# Altium PCB slimWiFi_B.PcbDoc
Units mil, origin at the board's own origin, x right, y up, seen from the top; angles counter-clockwise.
Board outline 2300 x 2000 mil, 2 copper layers (Top Layer, Bottom Layer), stack 61.8 mil thick; 44 components, 25 nets, 156 pads, 246 vias.
Unrouted connection lines stored in the file: 5.
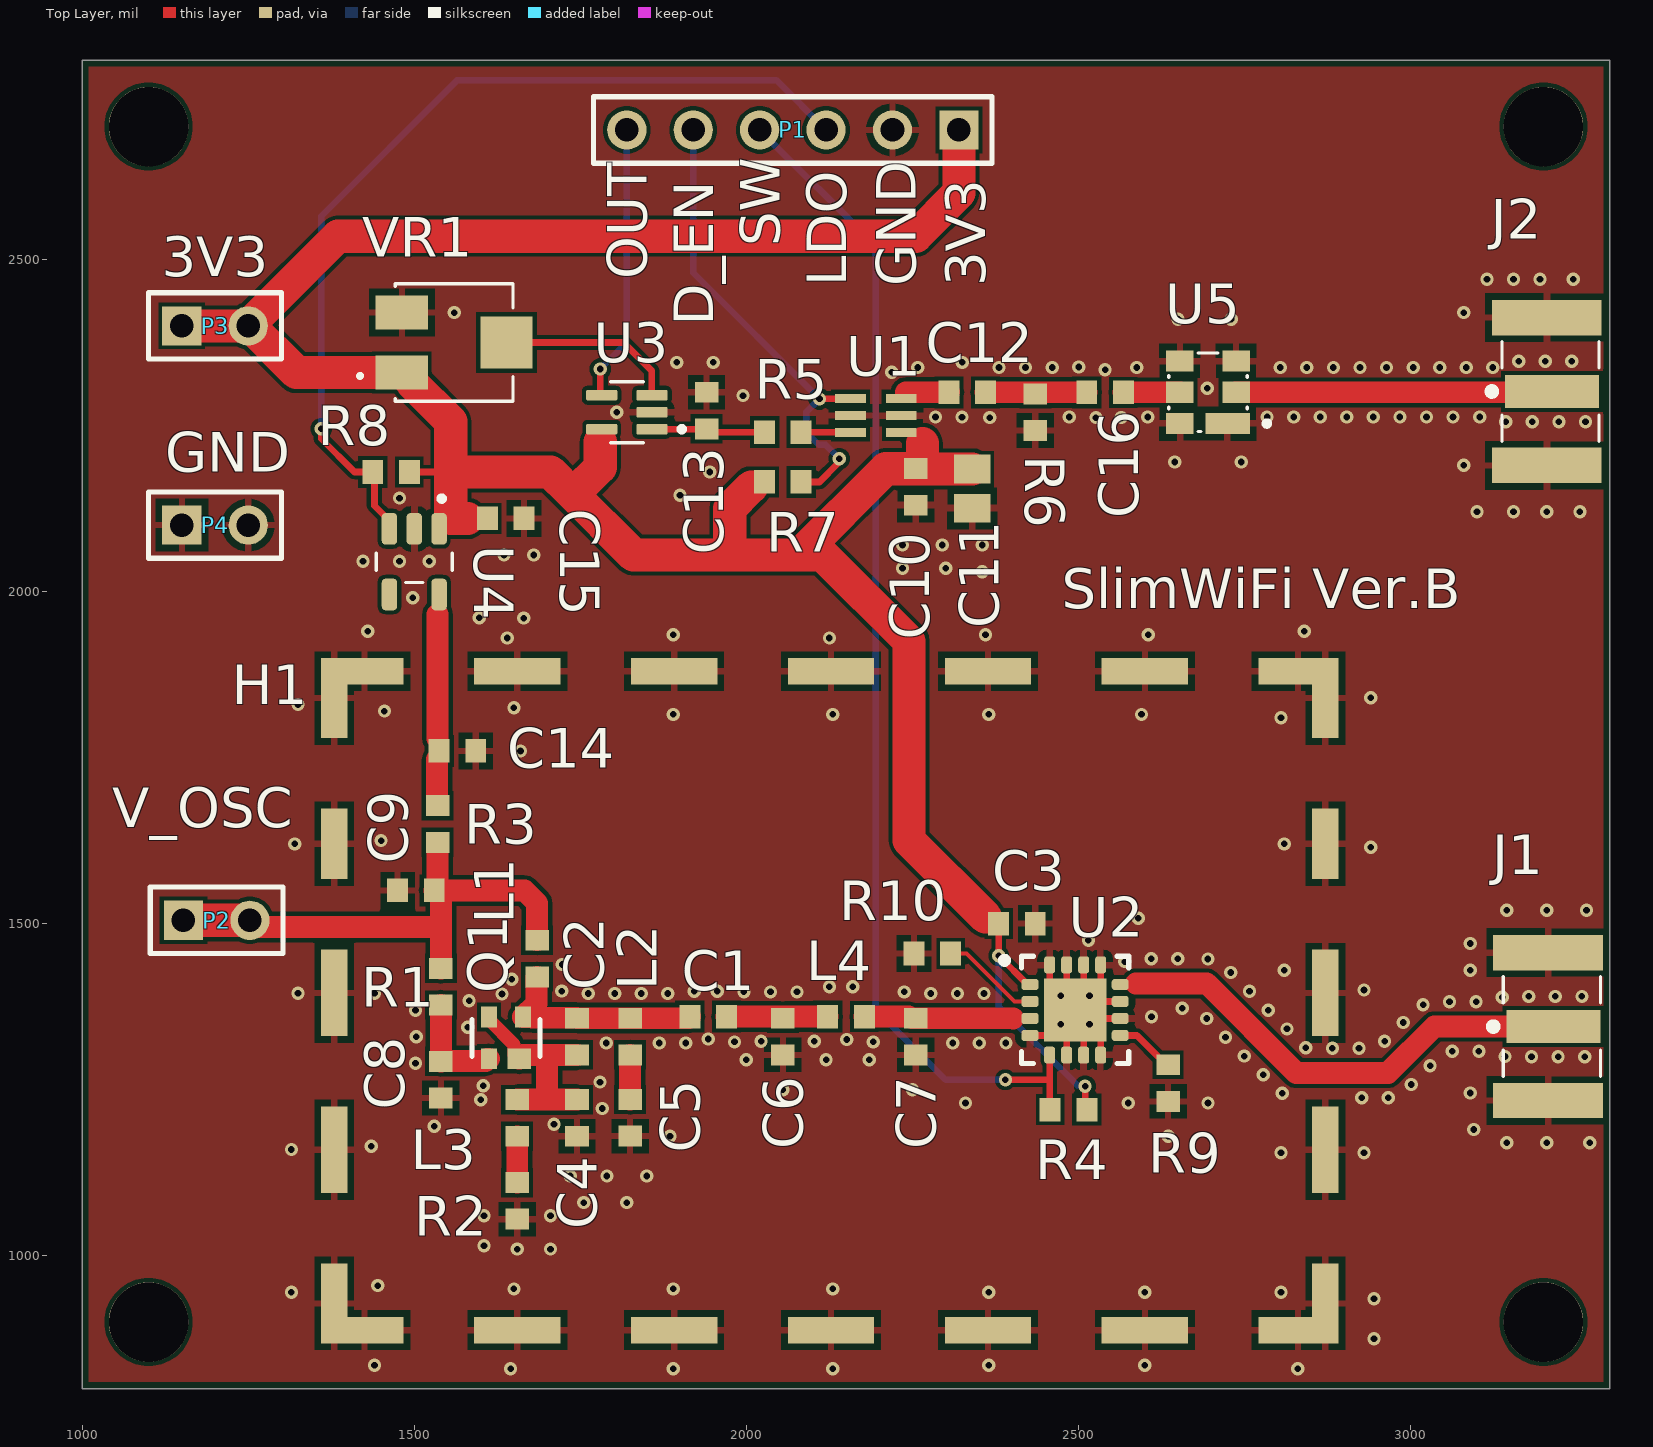
[diagram p0: Top Layer view]
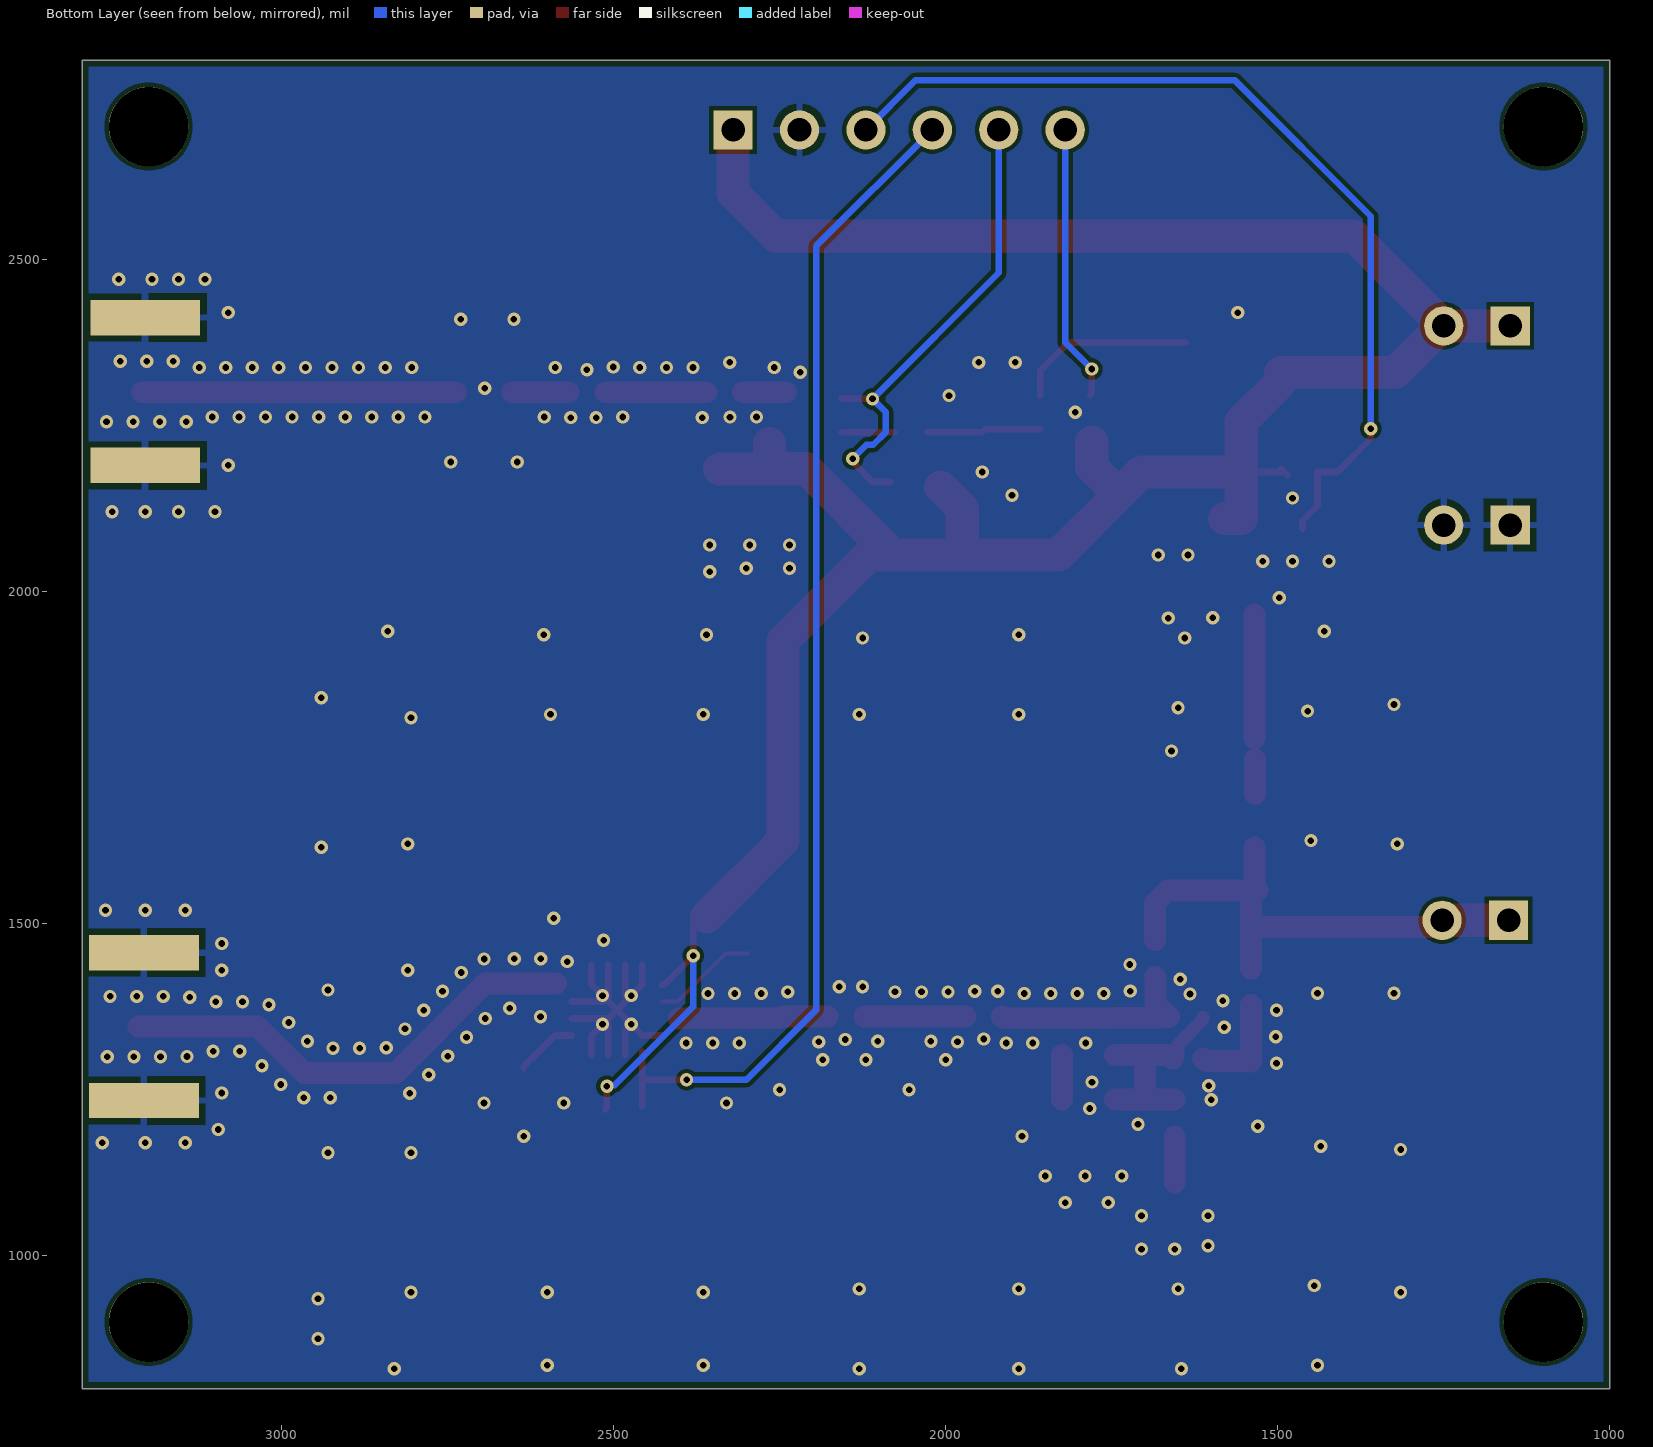
[diagram p1: Bottom Layer view, seen from below]

## Layer stack, top to bottom
Top Solder: solder mask 0.4, Solder Resist, Dk 3.5
Top Layer: signal copper 1.4
Dielectric 1: core 59, Core-043, Dk 4.3
Bottom Layer: signal copper 1.4
Bottom Solder: solder mask 0.4, Solder Resist, Dk 3.5

## Board outline
1000,800 3300,800 3300,2800 1000,2800

## Design rules (kind name [scope] priority, off if disabled: settings)
BoardOutlineClearance [All] p1: gap=10 ignorepadtopadclearanceinfootprint=FALSE except(0: Arc-SplitContinuation Track-SplitContinuation SMDPad-SplitContinuation THPad-SplitContinuation Via-SplitContinuation Fill-SplitContinuation Poly-SplitContinuation Region-SplitContinuation Text-SplitContinuation)
Clearance [All] p1: gap=6 ignorepadtopadclearanceinfootprint=FALSE
HoleSize [All] p1: absolutevalues=TRUE maxlimit=120 minlimit=1 maxpercent=80.000 minpercent=20.000
MinimumSolderMaskSliver [All] p1: minsoldermaskwidth=4
PolygonConnect [All] p1: thpad.connectstyle=Relief thpad.reliefconductorwidth=10 thpad.reliefentries=4 thpad.polygonreliefangle="90 Angle" thpad.airgapwidth=10 smdpad.connectstyle=Relief smdpad.reliefconductorwidth=10 smdpad.reliefentries=4 smdpad.polygonreliefangle="90 Angle" smdpad.airgapwidth=10 via.connectstyle=Direct via.reliefconductorwidth=10 via.reliefentries=4 via.polygonreliefangle="90 Angle" via.airgapwidth=10
RoutingVias [All] p1: holewidth=28 width=28 viastyle="Through Hole" minholewidth=6 minwidth=12 maxholewidth=50 maxwidth=50
SilkToSilkClearance [All] p1: silktosilkclearance=4
SilkToSolderMaskClearance [IsPad] p1: minsilkscreentomaskgap=4 clearancetoexposedcopper=TRUE
SolderMaskExpansion [All] p1: expansion=4 istentingtop=FALSE
Width [All] p1: maxlimit=80 minlimit=6 preferedwidth=33
26 further rules are at their usual default settings.

## Classes and differential pairs
component class SlimRx: C10 C11 C12 C13 C16 J2 R5 R6 R7 U1 U3 U5 VR1
component class SlimPower: C14 C15 H1 P1 P2 P3 P4 R8 U4
component class SlimTx: C1 C2 C3 C4 C5 C6 C7 C8 C9 J1 L1 L2 L3 L4 Q1 R1 R2 R3 R4 R9 R10 U2

## Components (designator, comment, footprint, x,y, rotation, side; value= is the part's Value field where it differs from the comment)
C1 "1n" SMD-0603 1942.56,1360 r180 top
C2 "2.7p" SMD-0603 1745,1330 r90 top
C3 "1uF" SMD-0603 2407.44,1500 r180 top
C4 "3.6p" SMD-0603 1745,1207.44 r90 top
C5 "1.2p" SMD-0603 1825,1207.56 r90 top
C6 "0.5pF" SMD-0603 2055,1330 r90 top
C7 "3p_DNI" SMD-0603 2255,1330 r90 top
C8 "1n" SMD-0603 1540,1265 r90 top
C9 "100pF" SMD-0603 1502.44,1550 r0 top
C10 "100pF" SMD-0603 2255,2157.44 r90 top
C11 "0.1uF" SMD-0805 2340,2155 r90 top
C12 "1nF" SMD-0603 2332.56,2300 r180 top
C13 "1nF_DNI" SMD-0603 1940,2272.44 r270 top
C14 "1uF" SMD-0603 1565,1760 r180 top
C15 "1uF" SMD-0603 1637.56,2110 r180 top
C16 "1nF" SMD-0603 2540,2300 r180 top
H1 "BMI-S-205-F" LAIRD_BMI-S-205-F 2125.59,1383.94 r90 top
J1 "SMA-J-P-H-ST-EM1" SMA-J-P-H-ST-EM1 3215,1345 r90 top
J2 "SMA-J-P-H-ST-EM1" SMA-J-P-H-ST-EM1 3212.87,2301.22 r90 top
L1 "22nH" SMD-0603 1685,1447.44 r90 top
L2 "1.6nH" SMD-0603 1825,1330 r90 top
L3 "22nH" SMD-0603 1655,1207.44 r90 top
L4 "1.6nH" SMD-0603 2150,1360 r0 top
P1 "Header 6" HDR1X6 2320,2695 r180 top
P2 "Header 2" HDR1X2 1152.45,1505 r0 top
P3 "Header 2" HDR1X2 1150,2400 r0 top
P4 "Header 2" HDR1X2 1150,2100 r0 top
Q1 "BFP620" SOT343 1638.12,1327.99 r0 top
R1 "10k" SMD-0603 1540,1405 r90 top
R2 "330" SMD-0603 1655,1082.56 r90 top
R3 "0" SMD-0603 1535,1650 r270 top
R4 "10k" SMD-0603 2485,1220 r180 top
R5 "0" SMD-0603 2055,2240 r180 top
R6 "47" SMD-0603 2435,2270 r90 top
R7 "0" SMD-0603 2055,2165 r0 top
R8 "0" SMD-0603 1465,2180 r180 top
R9 "50" SMD-0603 2635,1260 r270 top
R10 "1k" SMD-0603 2280,1455 r0 top
U1 "LT5534ESC6TR" SOT-6_SC 2195,2265 r0 top
U2 "HMC8038" "PQFN127P600-8N LFCSP-17" 2495,1370 r0 top
U3 "LMV7271MG" SOT65P210X110-5N 1820,2270 r180 top
U4 "TPS7A02XXDBV" SOT95P280X145-5N 1500,2045 r270 top
U5 "SF2124E" FIL_SF2124E 2695,2300 r180 top
VR1 "3314J-1" TRIM_3314J-1 1560,2375 r270 top

## Footprints (in the part's own frame and the unit in brackets; to place one, negate y for a bottom-side part, rotate by r counter-clockwise, add the part's x,y. Pads: shape width x height; smd on the part's side, far side on the other; paste and mask are expansions set on the pad)
FIL_SF2124E [mm] "SMD6"
  rect 1.7x0.81 smd mask+0.051: 1(-0.75,1.195)
  rect 1.05x0.81 smd mask+0.051: 2(-1.075,0) 3(-1.075,-1.195) 4(1.075,-1.195) 5(1.075,0) 6(1.075,1.195)
  silkscreen extent -2.35,-1.5 1.5,1.5
HDR1X2 [mm] "Connector; Header; 2 Position"
  rect 1.5x1.5 hole 0.9: 1(0,0)
  round 1.5 hole 0.9: 2(2.54,0)
  silkscreen extent -1.27,-1.27 3.81,1.27
HDR1X6 [mm] "Connector; Header; 6 Position"
  rect 1.5x1.5 hole 0.9: 1(0,0)
  round 1.5 hole 0.9: 2(2.54,0) 3(5.08,0) 4(7.62,0) 5(10.16,0) 6(12.7,0)
  silkscreen extent -1.27,-1.27 13.97,1.27
LAIRD_BMI-S-205-F [mm]
  rect 1x3.3 smd: 1(-12.6,-12.05) 2(-12.6,-6.05) 3(-12.6,-0.05) 4(-12.6,5.95) 5(-12.6,11.95) 13(12.6,11.95) 14(12.6,5.95) 15(12.6,-0.05) 16(12.6,-6.05) 17(12.6,-12.05)
  rect 1x3 smd: 6(-12.6,17.8) 12(12.6,17.8) 18(12.6,-17.9) 24(-12.6,-17.9)
  rect 3.05x1 smd: 7(-11.575,18.95) 11(11.575,18.95) 19(11.575,-18.95) 23(-11.575,-18.95)
  rect 3.3x1 smd: 8(-5.7,18.95) 9(0.3,18.95) 21(0.3,-18.95) 22(-5.7,-18.95)
  rect 2.7x1 smd: 10(6,18.95) 20(6,-18.95)
"PQFN127P600-8N LFCSP-17" [mm] "4 mm × 4 mm Body and 0.90 mm Package Height"
  rrect50% 0.65x0.42 smd mask+0.051: 1(-1.725,0.975) 2(-1.725,0.325) 3(-1.725,-0.325) 4(-1.725,-0.975) 9(1.725,-0.975) 10(1.725,-0.325) 11(1.725,0.325) 12(1.725,0.975)
  rrect50% 0.42x0.65 smd mask+0.051: 5(-0.975,-1.725) 6(-0.325,-1.725) 7(0.325,-1.725) 8(0.975,-1.725) 13(0.975,1.725) 14(0.325,1.725) 15(-0.325,1.725) 16(-0.975,1.725)
  rect 2.4x2.4 smd mask+0.025: 17(0,0)
  silkscreen extent -2.82,-2.05 2.05,2.05, body extent -2.05,-2.05 2.05,2.05, height 1
SMA-J-P-H-ST-EM1 [mm] "SMA-J-P-H-ST-EM1"
  rect 1.27x3.6 smd: 1(0,0)
  rect 1.35x4.2 smd: 2_1(-2.825,0.2) 3_1(2.825,0.2)
  rect 1.35x4.2 smd far side: 2_2(-2.825,0.2) 3_2(2.825,0.2)
  silkscreen extent -1.9,-1.8 1.9,2.44
SMD-0603 [mm] "SMD Body 1.6x0.8mm, IPC High Density"
  rect 0.8x0.9 smd: 1(-0.7,0) 2(0.7,0)
  body extent -0.87,-0.48 0.87,0.48, height 1.3
SMD-0805 [mm] "Chip Capacitor, Body 2.0x1.3mm, IPC High Density, 0805 Imperial, 2012 Metric"
  rect 1.1x1.4 smd: 1(-0.75,0) 2(0.75,0)
  body extent -1.1,-0.72 1.1,0.72, height 1.4
SOT65P210X110-5N [mm]
  rrect25% 1.19x0.4 smd mask+0.051: 1(-0.96,0.65) 2(-0.96,0) 3(-0.96,-0.65) 4(0.96,-0.65) 5(0.96,0.65)
  silkscreen extent -2.2,-1.17 0.63,1.17, body extent -1.05,-1 1.05,1, height 1.1
SOT95P280X145-5N [mm] "TPS7A02XXDBV"
  rrect50% 1.21x0.59 smd mask+0.051: 1(-1.255,0.95) 2(-1.255,0) 3(-1.255,-0.95) 4(1.255,-0.95) 5(1.255,0.95)
  silkscreen extent -2.51,-1.45 0.8,1.45
SOT343 [mm]
  rect 0.6x0.8 smd: 1(-0.65,-0.8) 3(0.65,0.8) 4(-0.65,0.8)
  rect 0.9x0.8 smd: 2(0.5,-0.8)
  silkscreen extent -1.3,-0.7 1.3,0.7
SOT-6_SC [mm]
  rect 1.171x0.351 smd mask+0.051: 1(-0.97,0.65) 2(-0.97,0) 3(-0.97,-0.65) 4(0.97,-0.65) 5(0.97,0) 6(0.97,0.65)
TRIM_3314J-1 [mm] "3314 - 4mm Square Trimpot Trimming Potentiometer"
  rect 1.3x2 smd: 1(1.15,-2) 3(-1.15,-2)
  rect 2x2 smd: 2(0,2)
  silkscreen extent -2.25,-3.65 2.25,2.25

## Part data
C1 C2 C3 C4 C5 C6 C7 C8 C9 C10 C12 C13 C14 C15 C16: library part CAP0603, "Ceramic Capacitor 0603"
C11: library part CAP0805, "Ceramic Capacitor 0805 Imperial (2012 Metric)"
H1: "RF Shield Frame 1.000 _25.40mm_ X 1.500 _38.10mm_ Solder", Package="TSSOP-14 Laird", Availability=Unavailable, MF="Laird Technologies", MP=BMI-S-205-F, Price=None, SnapEDA_Link=https://www.snapeda.com/parts/BMI-S-205-F/Laird%20Technologies%20EMI/view-part/596236/?ref=snap
J1 J2: "Connector SMA F 50Ohm Solder ST Edge Mount Gold Over Nickel Tray", Package=None, Availability=Unavailable, MF=Samtec, MP=SMA-J-P-H-ST-EM1, Price=None, SnapEDA_Link=https://www.snapeda.com/parts/SMA-J-P-H-ST-EM1/Samtec%20Inc./view-part/?ref=snap
L1 L2 L3 L4: library part L0603, "Inductor 0603"
P1: "Header, 6-Pin", LatestRevisionDate=17-Jul-2002, LatestRevisionNote="Re-released for DXP Platform.", Publisher="Altium Limited"
P2 P3 P4: "Header, 2-Pin", LatestRevisionDate=17-Jul-2002, LatestRevisionNote="Re-released for DXP Platform.", Publisher="Altium Limited"
Q1: "Trans RF BJT NPN 2.3V 0.08A 185mW Automotive 4-Pin(3+Tab) SOT-343 T/R", Package=None, Availability="In Stock", Check_prices=https://www.snapeda.com/parts/BFP620/Infineon+Technologies/view-part/?ref=eda, MF="Infineon Technologies", MP=BFP620, Price=None, Purchase-URL=https://pricing.snapeda.com/search/part/BFP620/?ref=eda, SnapEDA_Link=https://www.snapeda.com/parts/BFP620/Infineon+Technologies/view-part/?ref=snap
R1 R2 R3 R4 R5 R6 R7 R8 R9 R10: library part RES0603, "Resistor-0603"
U1 U3: Package=None, Availability=Unavailable, Price=None
  U1: MP=LT5534ESC6TR
  U3: MP=LMV7271MG
U2: "High Isolation, Silicon SPDT, Nonreflective Switch, 0.1 GHz to 6.0 GHz"
U4: "TPS7A02 Nanopower IQ, 25-nA, 200-mA, Low-Dropout Voltage Regulator With Fast / Transient Response"
U5: "Signal Conditioning FILTER, SAW, 2441.8 MHZ, 6SMD"
VR1: "10 kOhms 0.25W, 1/4W J Lead Surface Mount Trimmer Potentiometer Cermet 1 Turn Top Adjustment", Package="DFN-8 Bourns", Availability=Good, Check_prices=https://www.snapeda.com/parts/3314J-1-103E/Bourns/view-part/485632/?ref=eda, MF=Bourns, MP=3314J-1-103E, Price=None, Purchase-URL=https://pricing.snapeda.com/search/part/3314J-1-103E/?ref=eda, SnapEDA_Link=https://www.snapeda.com/parts/3314J-1-103E/Bourns/view-part/485632/?ref=snap

## Free pads (board coordinates)
  round 120 hole 120 unplated: 1(1100,900) 1(1100,2700) 1(3200,900) 1(3200,2700)

## Via types
v1: diameter 20, hole 10, Top Layer to Bottom Layer, tented both sides, 246 vias

## Nets (pads, with @x,y where several pads share a name; then routed paths per layer and width w, separated by ;. In a path a pad name is that pad's centre, name@x,y a point inside that pad or via, vN(x,y) a via of type N, cw(c..) or ccw(c..) an arc to the next point about the centre after c; other vN are vias at no path point)
1V2: C9.2 L1.2 P2.1 P2.2 R1.2 R3.2 | length 762.8
  Top Layer w33: P2.2 1262.45,1495 1535,1495 ; C9.2 1665.67,1550 1685,1530.67 L1.2 ; C9.2@1535,1555 R3.2@1535,1615 ; R1.2 1540,1530
  Top Layer w50: P2.1 P2.2
1V8: C14.2 R3.1 U4.5 | length 238.7
  Top Layer w33: 1534.4,1695 C14.2@1534.4,1746.96 ; 1535,1778.63 1535,1965.38
3V3: C3.2 C10.2 C11.2 C15.2 P1.1 P3.1 P3.2 R4.1 R7.1 R8.1 U1.4 U2.1 U3.5 U4.1 VR1.1 | length 4193.3
  Top Layer w10: R8.1@1485,2175 R8.1@1495,2185 ; R8.1@1495,2180 1555,2180 ; C3.2 v1(2379.88,1451.65) 2423.15,1408.39 U2.1 ; v1(2510,1255) 2510,1222.56 R4.1
  Top Layer w50: P3.1 P3.2 ; 1580,2110 1555,2110 1555,2180 ; 1780,2225 1780,2187.2 1742.8,2150 1735,2150 ; 2007.5,2157.5 1975,2125 1975,2055 ; C10.2@2261.74,2184.53 C11.2 ; 2265,2223.01 2265,2195 C10.2 2210,2185 2080,2055 ; P1.1 2320,2600 2255,2535 1385,2535 P3.2 ; 2360,1510 2245,1625 2245,1925 2115,2055 2080,2055 ; P3.2 1252.45,2400 1322.73,2329.72 VR1.1 1495.04,2329.72 1495.63,2329.13 1495.63,2315.35 1555,2255.98 1555,2180 ; 1555,2180 1705,2180 1735,2150 ; 1735,2150 1830,2055 1975,2055 ; 1975,2055 2080,2055
  Bottom Layer w10: v1(2379.88,1451.65) 2379.88,1375.12 2498.09,1256.91 2508.09,1256.91 v1(2510,1255)
DET_OUT: C13.2 R5.2 U3.1 | length 171.9
  Top Layer w10: U3.1 1939.53,2244.41 C13.2 1944.88,2240 R5.2
GND: C3.1 C4.1 C5.1 C6.1 C7.1 C8.1 C9.1 C10.1 C11.1 C13.1 C14.1 C15.1 H1.1 H1.2 H1.3 H1.4 H1.5 H1.6 H1.7 H1.8 H1.9 H1.10 H1.11 H1.12 H1.13 H1.14 H1.15 H1.16 H1.17 H1.18 H1.19 H1.20 H1.21 H1.22 H1.23 H1.24 J1.2_1 J1.2_2 J1.3_1 J1.3_2 J2.2_1 J2.2_2 J2.3_1 J2.3_2 P1.2 P4.1 P4.2 R2.1 R6.1 R9.2 R10.1 U1.2 U1.5 U2.4 U2.6 U2.7 U2.8 U2.10 U2.11 U2.13 U2.14 U2.15 U2.16 U2.17 U3.2 U4.2 U5.1 U5.3 U5.4 U5.6 VR1.3 | length 609.1
  Top Layer w10: U2.4 2456.61,1331.61 U2.17 ; U2.16 2456.61,1408.39 v1(2473.35,1391.65) U2.17 ; v1(2473.35,1348.35) 2482.2,1339.49 U2.6 ; U2.17@2482.2,1391.65 U2.15 ; U2.7 U2.17@2507.8,1348.35 ; U2.14 2507.8,1382.8 U2.17 ; v1(2516.65,1348.35) 2533.39,1331.61 U2.8 ; U2.17@2516.65,1382.8 U2.11 ; v1(2516.65,1391.65) 2533.39,1408.39 U2.13 ; U2.10 2507.8,1357.2 U2.17
  other v1: 1645,830 1890,830 2130,830 2830,830 1440,835 2365,835 2600,835 2945,875 2945,935 1315,945 2365,945 2600,945 2805,945 1650,950 1890,950 2130,950 1445,955 1655,1010 1705,1010 1605,1015 1605,1060 1705,1060 1755,1080 1820,1080 1735,1120 1790,1120 1850,1120 2805,1155 2930,1155 1315,1160 1435,1165 3145,1170 3205,1170 3270,1170 1885,1180 2635,1180 3095,1190 1530,1195 1710.46,1197.78 1783.11,1221.57 2330,1230 2575,1230 2695,1230 1600,1235 2926.36,1237.78 2966.36,1237.9 2806.95,1244.63 3090,1245 2055,1250 2250,1250 1603.96,1256.1 3001.11,1257.69 1779.64,1261.42 2778.02,1272.26 3029.4,1285.98 1501.89,1289.78 2000,1295 2120,1295 2185,1295 3142.17,1300 3182.16,1299.61 3222.16,1299.61 3262.16,1299.61 2749.73,1300.54 3062.93,1307.78 3102.93,1307.78 2882.34,1312.22 2922.34,1312.22 2842.36,1313.18 1788.93,1320.34 1868.93,1320.34 1908.93,1320.34 2310.74,1320.34 2350.74,1320.34 2390.74,1320.34 1982.19,1321.89 2190.82,1321.89 2022.18,1322.78 2102.13,1322.79 2960.93,1322.77 2150.98,1325.47 1942.42,1326.21 2721.45,1328.83 1502.78,1329.77 2814.07,1341.46 1580.32,1344.03 2989.21,1351.05 2693.16,1357.11 2610,1360 1501.89,1369.76 2785.79,1369.75 2656.36,1372.78 3018.9,1377.86 3058.66,1382.22 3098.66,1382.22 1582.5,1383.97 3138.05,1389.18 3178.03,1390.39 3218.03,1390.39 3258.03,1390.39 1632.14,1394.07 1325,1395 1440,1395 1761.81,1394.77 1801.81,1394.77 1841.81,1394.77 1881.81,1394.77 2277.72,1394.77 2317.72,1394.77 2357.72,1394.77 1996.29,1397.22 2036.29,1397.22 2076.29,1397.22 2237.8,1397.22 1721.97,1398.43 1921.67,1398.11 1956.3,1398.11 2757.5,1398.03 2930,1400 2125,1405 2160,1405 1646.57,1416.06 2729.22,1426.32 2810,1430 3090,1430 1722.55,1438.43 2569.65,1442.84 2609.41,1447.22 2649.41,1447.22 2694.88,1446.82 3090,1470 2515,1475 2590.03,1507.96 3145,1520 3205,1520 3265,1520 2940,1615 1320,1620 2810,1620 1450,1625 1660,1760 2805,1810 1890,1815 2130,1815 2365,1815 2595,1815 1455,1820 1650,1825 1325,1830 2940,1840 1640,1930 2125,1930 1890,1935 2360,1935 2605,1935 1430,1940 2840,1940 1665,1960 1597.73,1960.69 1497.73,1990.69 2355,2030 2235,2035 2300,2035 1422.73,2045.69 1477.73,2045.69 1522.73,2045.69 1635,2055 1680,2055 2235,2070 2295,2070 2355,2070 3100,2120 3155,2120 3205,2120 3255,2120 1477.73,2140.69 1900,2145 1945,2180 3080,2190 2645,2195 2745,2195 3143.38,2255.83 3183.38,2255.83 3223.38,2255.83 3263.38,2255.83 2366.36,2261.89 2526.29,2261.89 2564.22,2261.89 2284.69,2262.78 2324.69,2262.68 2486.3,2262.78 2604.21,2262.78 2783.99,2262.78 2823.99,2262.78 2863.99,2262.78 2903.99,2262.78 2943.99,2262.78 2983.99,2262.78 3023.99,2262.78 3063.99,2262.78 3103.99,2262.78 1805,2270 1995,2295 2693.74,2305.9 2218.77,2330.18 2540.11,2333.8 2258.15,2337.22 2380.36,2337.22 2420.36,2337.22 2460.36,2337.22 2587.8,2337.22 2803.85,2337.22 2843.85,2337.22 2883.85,2337.22 2923.85,2337.22 2963.85,2337.22 3003.85,2337.22 3043.85,2337.22 3083.85,2337.22 3123.85,2337.22 2500.35,2338.11 1895,2345 1950,2345 2325,2345 3162.73,2346.61 3202.73,2346.61 3242.73,2346.61 2650,2410 2730,2410 1560,2420 3080,2420 3115,2470 3155,2470 3195,2470 3245,2470
LDO_EN: P1.3 R8.2 U4.3 | length 1404.1
  Top Layer w10: v1(1360,2245) 1360,2230 1410,2180 R8.2 ; R8.2@1440,2180 1440,2129.21 1462.6,2106.61 U4.3
  Bottom Layer w10: v1(1360,2245) 1360,2565 1565,2770 2045,2770 P1.3
NetC1_1: C1.1 C6.2 L4.1 | length 146.5
  Top Layer w33: C1.1 C6.2@2052.09,1360 ; C6.2@2057.91,1360 L4.1
NetC1_2: C1.2 C2.2 L1.1 L2.2 Q1.3 | length 322.9
  Top Layer w33: L1.1 1684.54,1419.88 1683.78,1419.13 1683.78,1379.56 Q1.3 1676.61,1359.49 1677.78,1358.31 1744.25,1358.31 C2.2 L2.2 1913.02,1357.56 1915,1359.54 C1.2
NetC2_1: C2.1 C4.2 L3.2 Q1.2 Q1.4 | length 330
  Top Layer w20: Q1.4 1612.53,1355.55 1650.09,1317.99 1650.09,1302.24 1655.83,1296.49 Q1.2
  Top Layer w33: L3.2 1700,1235 ; Q1.2 1658.27,1296.49 1664.21,1302.44 1700,1302.44 ; C4.2 1700,1235 ; C2.1 1700,1302.44 ; 1700,1235 1700,1302.44
NetC5_2: C5.2 L2.1 | length 67.3
  Top Layer w33: C5.2 L2.1
NetC7_2: C7.2 L4.2 U2.3 | length 218.9
  Top Layer w33: L4.2 C7.2@2244.54,1360 ; C7.2@2250,1357.56 2401.44,1357.56 2401.8,1357.2
NetC8_2: C8.2 Q1.1 R1.1 | length 159
  Top Layer w33: R1.1 C8.2 1540.75,1293.31 1607.22,1293.31 1610.4,1296.49 Q1.1
NetC12_1: C12.1 C16.2 R6.2 | length 152.3
  Top Layer w33: C12.1 2435,2300 C16.2
NetC12_2: C12.2 U1.6 | length 65
  Top Layer w33: 2240,2300 C12.2
NetC16_1: C16.1 U5.5 | length 85.1
  Top Layer w33: C16.1 U5.5
NetJ1_1: J1.1 U2.12 | length 713.3
  Top Layer w33: 2586.59,1410 2692.91,1410 2827.91,1275 2965.79,1275 3035.79,1345 J1.1
NetJ2_1: J2.1 U5.2 | length 472.7
  Top Layer w33: U5.2 J2.1@3210,2300
NetL3_1: L3.1 R2.2 | length 69.8
  Top Layer w33: R2.2 L3.1
NetP1_4: P1.4 R4.2 U2.5 | length 1785.6
  Top Layer w10: v1(2390,1265) 2455.16,1265 2456.61,1266.46 ; U2.5@2456.61,1307.09 U2.5 2456.61,1266.46 ; R4.2@2457.44,1225 2456.61,1225.83 2456.61,1266.46
  Bottom Layer w10: P1.4 2195,2520 2195,1370 2300,1265 v1(2390,1265)
NetP1_5: P1.5 R7.2 U1.1 | length 746.6
  Top Layer w10: R7.2 2110,2165 2138.09,2193.09 2138.09,2198.09 v1(2140,2200) ; v1(2110,2290) 2110.3,2290.3 2156.52,2290.3 U1.1 U1.1@2140.66,2290.59
  Bottom Layer w10: P1.5 1920,2480 v1(2110,2290) 2090,2270 2090,2240 2109.04,2220.96 2119.04,2220.96 v1(2140,2200)
NetP1_6: P1.6 U3.4 | length 416.9
  Top Layer w10: v1(1780,2335) 1780,2297.8 U3.4
  Bottom Layer w10: v1(1780,2335) 1820,2375 P1.6
NetR5_1: R5.1 U1.3 | length 78.5
  Top Layer w10: R5.1@2077.56,2240 U1.3@2156.04,2240
NetR9_1: R9.1 U2.9 | length 94.2
  Top Layer w10: U2.9 2587.91,1331.61 2621.22,1298.31 2622.28,1298.31 2635,1285.59 R9.1@2635,1282.56
NetR10_2: R10.2 U2.2 | length 159.1
  Top Layer w6: R10.2@2297.85,1455 2331.75,1455 2403.69,1383.06 2426.82,1383.06 U2.2
NetU3_3: U3.3 VR1.2 | length 273.4
  Top Layer w10: VR1.2 1815,2375 1857.8,2332.2 U3.3
pads on no net: U4.4

## Polygon pours and split planes (outlines as drawn)
GND on Top Layer "GND_L01_P000" (solid, pour order 0): 1000,800 3300,800 3300,2800 1000,2800
GND on Bottom Layer "GND_L02_P001" (solid, pour order 1): 1000,800 3300,800 3300,2800 1000,2800

## Silkscreen, mask and mechanical layers (free items; w line width, h text height)
Top Overlay:
  text "SW" at 2050,2520 h60 r90
  text "3V3" at 1120,2475 h60
  text "OUT" at 1850,2470 h60 r90
  text "LDO" at 2150,2460 h60 r90
  text "GND" at 2255,2460 h60 r90
  text "3V3" at 2360,2460 h60 r90
  text "D_EN" at 1950,2400 h60 r90
  text "GND" at 1125,2180 h60
  text "SlimWiFi Ver.B" at 2475,1975 h60
  text "V_OSC" at 1045,1645 h60